# EAGLE board uSBasp (EAGLE 6.4)
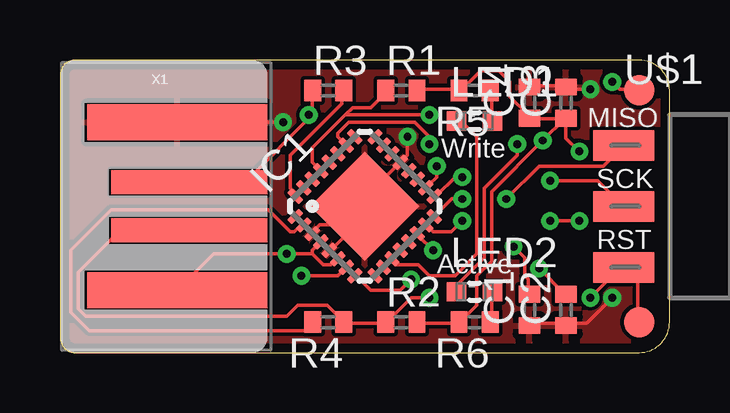
[diagram p0: board, top side]
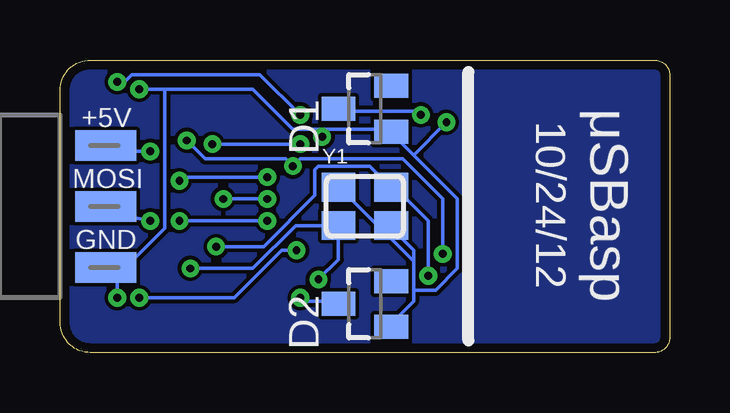
[diagram p1: board, bottom side, seen from below]

Size 25.4 x 12.19 mm. Coordinates in mm from the lower left corner, seen from the top.
Outline: 0,11.56 0,0.64 arc90 0.64,0 24.13,0 arc90 25.4,1.27 25.4,10.92 arc90 24.13,12.19 0.64,12.19 arc90 0,11.56
Copper layers (1*16): Top 0.035mm / dielectric 1.5mm / Bottom 0.035mm
Design rules "default *": minimum track width 6mil, minimum drill 13mil, track to track 6mil, track to pad 6mil, pad to pad 6mil, via to via 6mil, smd to smd 6mil, copper to edge 15mil, drill to drill 6mil, minimum pad ring 10mil, minimum via ring 8mil, stop-mask expansion 4mil, vias tented up to drill 0mil, thermal gap 10mil
vRestrict: area 0,0 to 8.9,12.2

## Footprints (pad centres in the part's own frame; a part is rotated, then mirrored left to right if it is on the bottom)
C0402 = smd 0.7 x 0.9: 1 -0.65,0; 2 0.65,0
SOT23 = smd 1 x 1.4: 1 -0.95,-1.1; 2 0.95,-1.1; 3 0,1.1
MLF32-TH = smd 0.7 x 0.3: 1 -2.35,1.75; 2 -2.35,1.25; 3 -2.35,0.75; 4 -2.35,0.25; 5 -2.35,-0.25; 6 -2.35,-0.75; 7 -2.35,-1.25; 8 -2.35,-1.75; 17 2.35,-1.75; 18 2.35,-1.25; 19 2.35,-0.75; 20 2.35,-0.25; 21 2.35,0.25; 22 2.35,0.75; 23 2.35,1.25; 24 2.35,1.75 | smd 0.3 x 0.7: 9 -1.75,-2.35; 10 -1.25,-2.35; 11 -0.75,-2.35; 12 -0.25,-2.35; 13 0.25,-2.35; 14 0.75,-2.35; 15 1.25,-2.35; 16 1.75,-2.35; 25 1.75,2.35; 26 1.25,2.35; 27 0.75,2.35; 28 0.25,2.35; 29 -0.25,2.35; 30 -0.75,2.35; 31 -1.25,2.35; 32 -1.75,2.35 | smd 3.2 x 3.2: TH 0,0
SML0603 = smd 0.8 x 0.8: A 0.75,0; C -0.75,0
R0402 = smd 0.7 x 0.9: 1 -0.65,0; 2 0.65,0
PAD.03X.05 = smd 1.27 x 1.27: P$1 0,0
M-2X03-0.1-PTH-EDGE = smd 2.54 x 1.27: 1 0,2.54; 3 0,0; 5 0,-2.54 | smd 2.54 x 1.27 bottom: 2 0,2.54; 4 0,0; 6 0,-2.54
USB-A-PCB = smd 7.5 x 1.5: 5V -0.2,-3.5; GND -0.2,3.5 | smd 6.5 x 1: USB_M 0.3,-1; USB_P 0.3,1
CRYSTAL-SMD-3.2X2.5 = smd 1.4 x 1.2: 1 -1.1,-0.8; 2 1.1,-0.8; 3 1.1,0.8; 4 -1.1,0.8

## Placement (x,y rotation side)
C1  22pF  [C0402]  19.56,1.78 90 top
C2  22pF  [C0402]  21.08,1.78 90 top
C3  0.1uF  [C0402]  21.08,10.41 90 top
C4  4.7uF  [C0402]  19.56,10.41 90 top
D1  3V6  [SOT23]  12.7,10.16 90 bottom
D2  3V6  [SOT23]  12.7,2.03 90 bottom
IC1  MEGA8-MI  [MLF32-TH]  12.7,6.1 45 top
LED1  Write (R)  [SML0603]  17.27,9.65 0 top
LED2  Active (G)  [SML0603]  17.27,2.54 0 top
R1  10k  [R0402]  14.22,10.92 0 top
R2  2.2k  [R0402]  14.22,1.27 0 top
R3  68  [R0402]  11.18,10.92 0 top
R4  68  [R0402]  11.18,1.27 180 top
R5  1k  [R0402]  17.27,10.92 180 top
R6  1k  [R0402]  17.27,1.27 180 top
TP1  TEST-POINT3X5  [PAD.03X.05]  24.13,10.92 0 top
TP2  TEST-POINT3X5  [PAD.03X.05]  24.13,1.27 0 top
U$1  M-2X03PTH  [M-2X03-0.1-PTH-EDGE]  23.5,6.1 0 top
X1  USBPCB  [USB-A-PCB]  5.08,6.1 0 top
Y1  12Mhz  [CRYSTAL-SMD-3.2X2.5]  12.7,6.1 0 bottom

## Library data of the parts
C1-C4 R1-R6 = rcl
D1 D2 = diode
IC1 = atmel; MPN: ATMEGA88PA-MU; OC_FARNELL: 1715491; OC_NEWARK: 15R0272
LED1 LED2 = led
TP1 TP2 = SparkFun-Passives
U$1 Y1 = Jordi
X1 = SparkFun-Connectors

## Nets
+5V: C3.1 C4.1 IC1.4 IC1.6 IC1.18 R1.2 R2.2 R5.2 R6.2 U$1.2 X1.5V
D+: IC1.32 R3.2
D-: IC1.2 R4.2
GND: C1.1 C2.1 C3.2 C4.2 D1.1 D2.1 IC1.3 IC1.5 IC1.21 IC1.TH U$1.6 X1.GND Y1.2 Y1.4
LED-A: IC1.26 LED2.C
LED-W: IC1.11 LED1.C
MISO: IC1.16 U$1.1
MOSI: IC1.15 U$1.4
N$1: LED1.A R5.1
N$2: LED2.A R6.1
N$3: D1.3 R3.1 X1.USB_P
N$4: D2.3 R2.1 R4.1 X1.USB_M
N$6: C1.2 IC1.7 Y1.3
N$7: C2.2 IC1.8 Y1.1
RESET: IC1.14 TP2.P$1 U$1.5
SCK: IC1.17 U$1.3
SELFPROG: IC1.29 R1.1 TP1.P$1

## Tracks (layer width: path | path; a pad name or v marks a point on that pad's centre or on a via)
+5V  (via drill 0.33)
  Top 0.152: R1.2 14.94,10.97 16.61,10.97 R5.2 16.76,10.97 17.53,11.73 18.29,11.73 18.75,11.28 18.75,10.67 19.51,9.91 C4.1 19.66,9.75 21.03,9.75 | R2.2 14.94,1.22 16.61,1.22 R6.2 16.76,1.37 17.37,1.98 17.37,3.2 17.98,3.81 17.98,6.71 v20.12,8.84 21.03,9.75 | v15.7,7.77 15.7,7.32 15.39,7.01 IC1.18 | 21.03,9.75 C3.1 | 21.18,9.91 C3.1 | 10.52,4.12 10.52,4.27 10.82,4.57 IC1.4 | 10.52,4.12 10.97,3.66 11.28,3.66 11.43,3.81 IC1.6 | 10.52,4.12 v9.45,4.12 6.4,4.12 5.03,2.74 X1.5V | v21.64,8.38 21.08,8.94 C3.1
  Bottom 0.152: v20.12,8.84 19.36,8.08 16,8.08 v15.7,7.77 15.39,8.08 11.12,8.08 9.45,6.4 v9.45,4.12 | 23.47,8.69 U$1.2 23.24,8.38 v21.64,8.38
D+
  Top 0.152: IC1.32 9.75,6.55 9.75,6.71 9.6,6.86 9.6,8.23 11.73,10.36 11.73,10.82 R3.2
D-
  Top 0.152: IC1.2 10.06,5.18 9.91,5.18 9.75,5.03 9.6,5.03 8.69,5.94 2.13,5.94 0.46,4.27 0.46,1.68 1.22,0.91 10.21,0.91 10.52,1.22 R4.2
GND  (via drill 0.33)
  Top 0.152: C1.1 19.66,1.22 21.03,1.22 C2.1 21.18,1.22 21.95,1.22 v23.01,2.29 | 12.34,5.33 12.65,5.64 12.65,6.1 IC1.TH | 12.34,5.33 11.28,4.27 IC1.5 | 12.34,5.33 11.58,5.33 | 11.58,5.33 10.82,5.33 10.52,5.03 IC1.3 | 12.34,5.33 IC1.TH | 11.58,5.33 IC1.21 14.33,8.08 14.48,8.23 v14.48,8.99 | 11.58,5.33 IC1.TH | C4.2 19.66,11.12 21.03,11.12 C3.2 21.18,10.97 v22.1,10.97 | v9.3,9.6 5.03,9.6 X1.GND
  Bottom 0.152: v23.01,2.29 23.01,3.05 23.16,3.2 | 23.16,3.2 23.47,3.5 U$1.6 | 10.67,3.81 10.67,4.27 11.58,5.18 Y1.2 | 10.67,3.81 10.67,2.59 | 10.67,2.59 10.67,2.13 11.58,1.22 D2.1 | 10.67,3.81 13.72,6.86 Y1.4 | 10.67,8.23 8.84,6.4 8.84,3.5 9.75,2.59 10.67,2.59 | 10.67,8.23 11.58,9.14 D1.1 11.73,9.3 14.48,9.3 | 21.03,10.97 17.37,10.97 15.7,9.3 14.48,9.3 | 21.03,10.97 v22.1,10.97 | 14.48,9.3 v14.48,8.99 | 21.03,10.97 21.03,5.18 22.66,3.56 U$1.6 | 23.16,3.2 U$1.6 | 10.67,8.23 v9.3,9.6
  pour Top: 25.4,10.92 25.4,1.27 arc-90 24.13,0 0.64,0 arc-90 0,0.64 0,11.56 arc-90 0.64,12.19 24.13,12.19 arc-90
GNS
  pour Bottom: 25.4,10.92 25.4,1.27 arc-90 24.13,0 0.64,0 arc-90 0,0.64 0,11.56 arc-90 0.64,12.19 24.13,12.19 arc-90
LED-A  (via drill 0.33)
  Top 0.152: v15.39,8.69 15.39,8.99 14.78,9.6 12.04,9.6 11.58,9.14 11.58,8.99 11.89,8.69 IC1.26 | LED2.C 16.61,2.59 16.61,2.9 17.68,3.96 17.68,6.86 19.05,8.23 v19.05,8.69
  Bottom 0.152: v19.05,8.69 v15.39,8.69
LED-W
  Top 0.152: IC1.11 13.87,3.81 14.02,3.66 14.94,3.66 15.39,3.2 16.46,3.2 17.37,4.12 17.37,8.99 16.61,9.75 LED1.C
MISO  (via drill 0.33)
  Top 0.152: v18.59,6.4 19.96,7.77 22.63,7.77 U$1.1 23.47,8.53 | 15.54,5.79 IC1.16 16.33,6.4 v16.76,6.4
  Bottom 0.152: v18.59,6.4 v16.76,6.4
MOSI  (via drill 0.33)
  Top 0.152: v16.76,5.49 16.31,5.03 15.54,5.03 15.39,5.18 IC1.15 | v21.64,5.49 v20.42,5.49
  Bottom 0.152: v20.42,5.49 v16.76,5.49 | v21.64,5.49 23.16,5.79 23.47,6.1 U$1.4
N$1
  Top 0.152: LED1.A 17.98,9.75 17.98,10.82 R5.1
N$2
  Top 0.152: LED2.A 17.98,2.44 17.98,1.37 R6.1
N$3  (via drill 0.33)
  Top 0.152: 10.52,9.91 10.52,10.82 R3.1 | 10.52,9.91 7.77,7.16 5.49,7.16 X1.USB_P | 10.52,9.91 v10.36,9.91
  Bottom 0.152: v10.36,9.91 10.52,10.06 13.72,10.06 D1.3
N$4  (via drill 0.33)
  Top 0.152: v15.39,2.29 14.63,2.29 13.72,1.37 R2.1 13.56,1.22 11.89,1.22 R4.1 11.73,1.37 11.12,1.98 9.91,1.98 9.45,1.52 1.07,1.52 0.76,1.83 0.76,3.35 2.44,5.03 5.33,5.03 X1.USB_M
  Bottom 0.152: v15.39,2.29 15.24,2.13 13.87,2.13 D2.3
N$6  (via drill 0.33)
  Top 0.152: v10.06,3.2 11.58,3.2 11.89,3.5 IC1.7 | 19.51,2.44 C1.2 19.51,2.48 19.51,3.05 19.36,3.2 19.36,3.96 v18.9,4.42
  Bottom 0.152: v10.06,3.2 10.06,5.49 11.58,7.01 Y1.3 11.73,7.01 12.5,7.77 14.63,7.77 14.78,7.62 14.78,6.55 16.92,4.42 v18.9,4.42
N$7  (via drill 0.33)
  Top 0.152: v14.63,3.05 14.17,2.59 12.95,2.59 12.34,3.2 IC1.8 | v19.96,3.5 21.03,2.44 C2.2
  Bottom 0.152: 14.17,4.88 13.87,5.18 Y1.1 | v19.96,3.5 17.37,3.5 15.58,5.3 Y1.1 | v14.63,3.05 13.8,3.88 Y1.1
RESET  (via drill 0.33)
  Top 0.152: v15.54,4.27 14.94,4.88 IC1.14 | v22.1,2.29 23.47,3.66 U$1.5 23.62,3.5 24.08,3.05 24.08,1.37 TP2.P$1
  Bottom 0.152: v15.54,4.27 16.15,4.27 18.14,2.29 v22.1,2.29
SCK  (via drill 0.33)
  Top 0.152: v20.42,7.16 22.4,7.16 23.47,6.1 U$1.3 | IC1.17 15.7,6.55 16.46,7.32 v16.76,7.32
  Bottom 0.152: v16.76,7.32 20.27,7.32 v20.42,7.16
SELFPROG  (via drill 0.33)
  Top 0.152: 11.89,9.91 12.19,10.21 12.95,10.21 13.56,10.82 R1.1 | 11.89,9.91 10.52,8.53 10.52,7.92 10.82,7.62 IC1.29 | v23.01,11.28 23.32,10.97 24.08,10.97 TP1.P$1 | 11.89,9.91 v15.39,9.91
  Bottom 0.152: v23.01,11.28 22.71,11.28 22.4,11.58 17.07,11.58 v15.39,9.91

## Text on the board
_tsilk: MISO | Write | SCK | RST | Active
_bsilk: μSBasp | 10/24/12 | +5V | MOSI | GND